# EAGLE board Netzteil_Darlington_v2 (EAGLE 8.6.3)
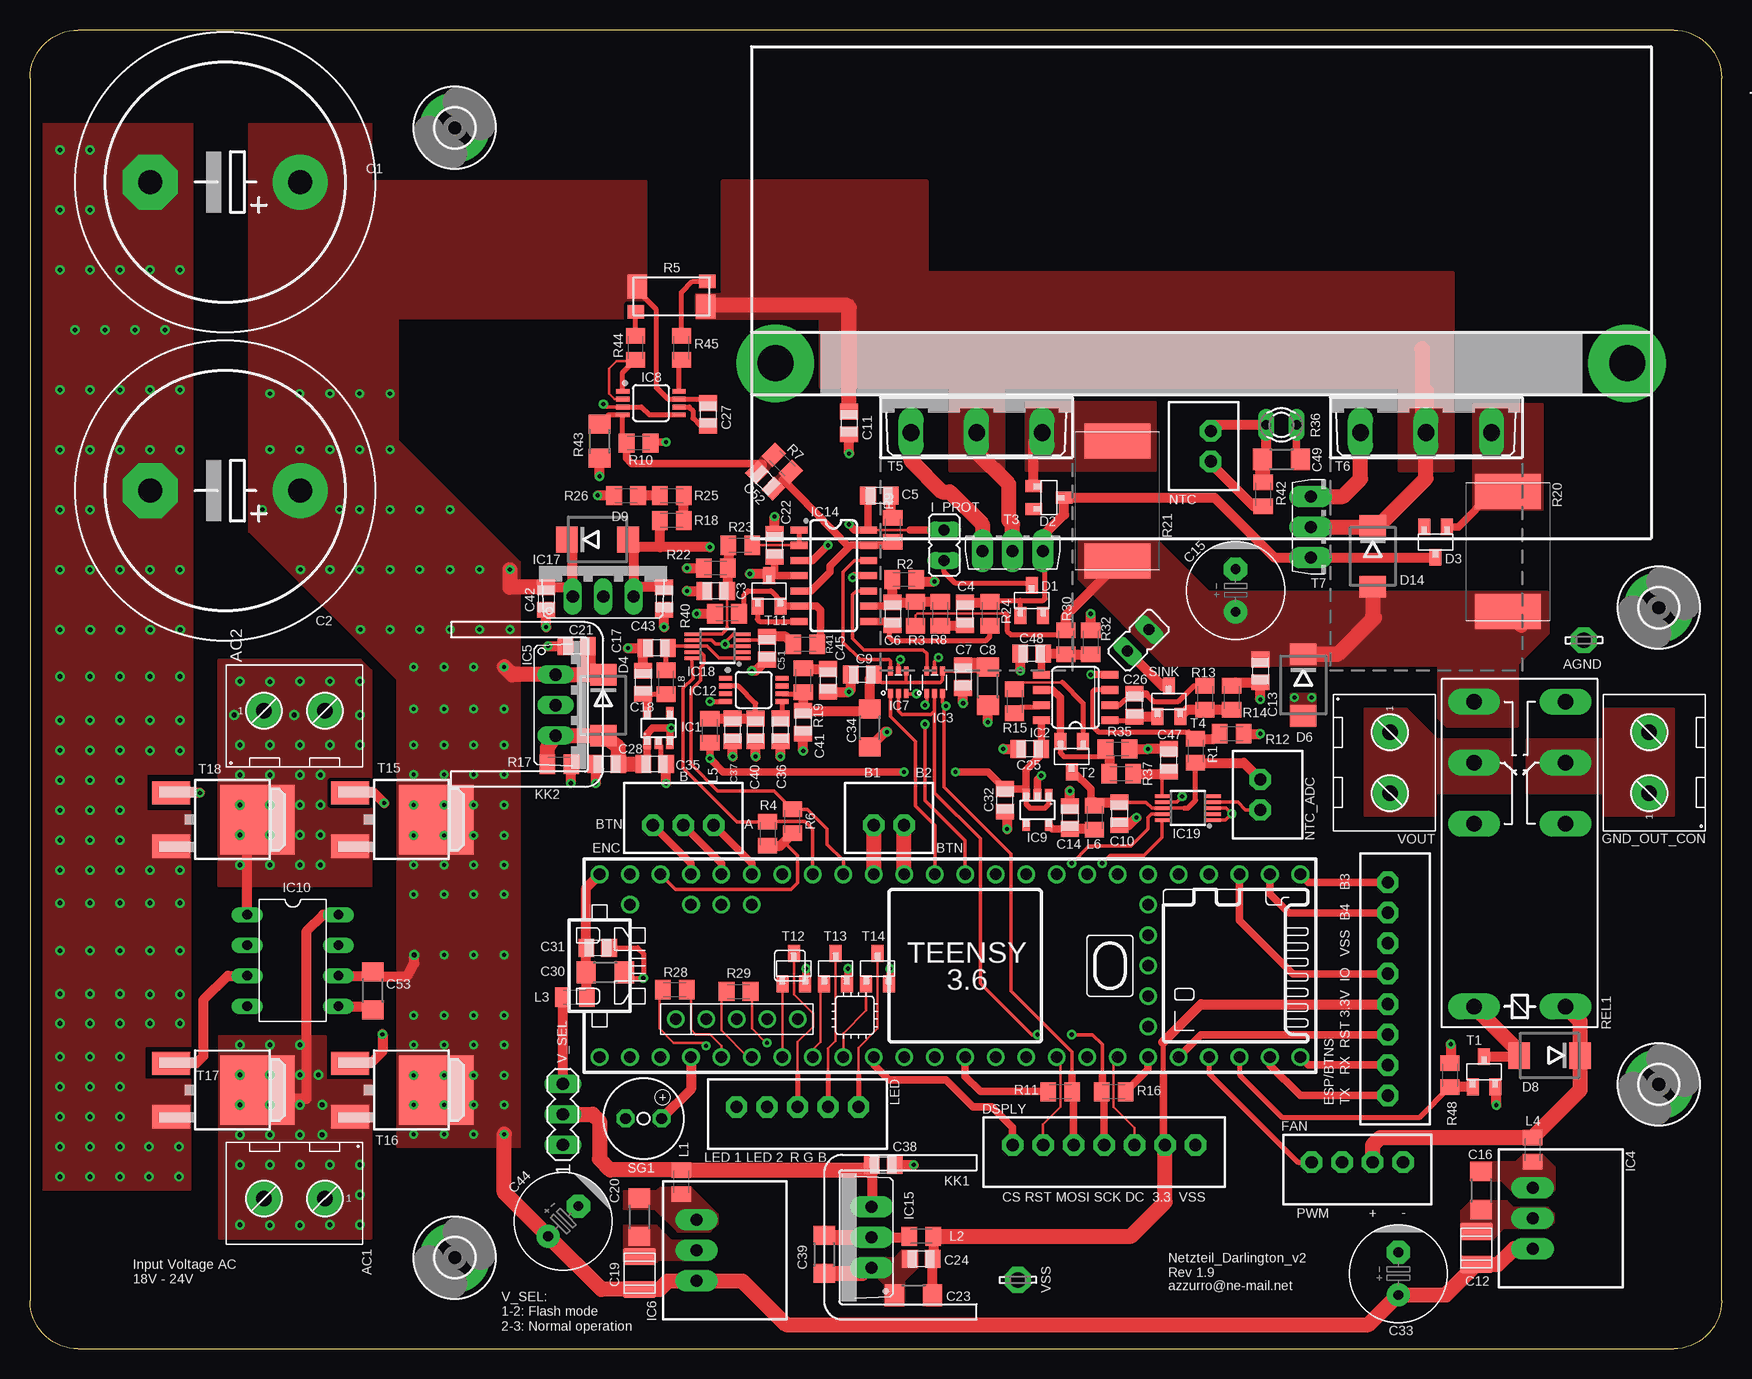
[diagram p0: board, top side]
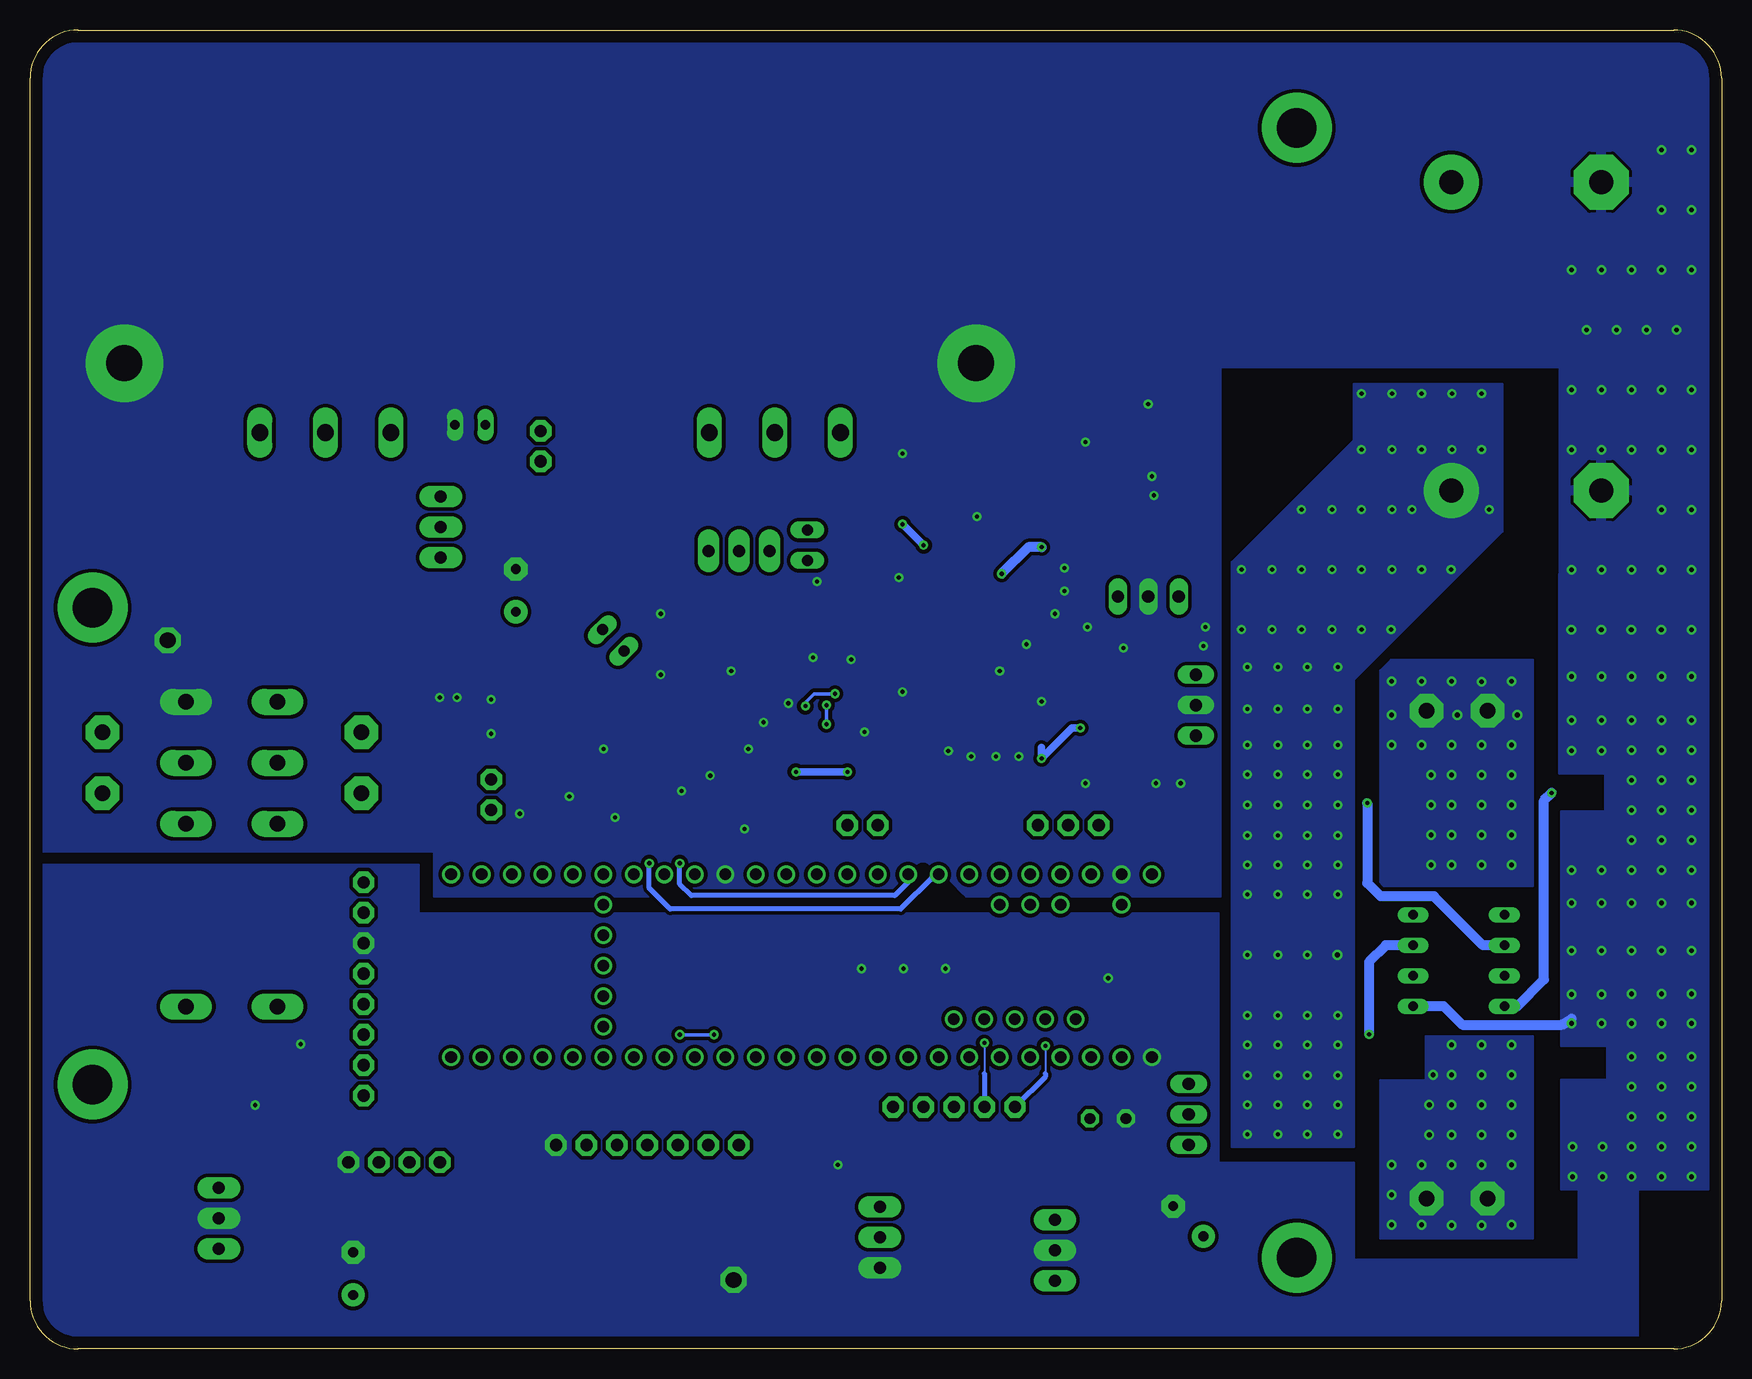
[diagram p1: board, bottom side, seen from below]

Size 141 x 109.94 mm. Coordinates in mm from the lower left corner, seen from the top.
Outline: 4,0 137,0 arc90 141,4 141,105.94 arc90 137,109.94 4,109.94 arc90 0,105.94 0,4 arc90 4,0
Copper layers (1*16): Top 0.035mm / dielectric 1.5mm / Bottom 0.035mm
Design rules "default *": minimum track width 6mil, minimum drill 0.2mm, track to track 6mil, track to pad 6mil, pad to pad 6mil, via to via 6mil, smd to smd 6mil, copper to edge 40mil, drill to drill 6mil, minimum pad ring 10mil, minimum via ring 8mil, stop-mask expansion 4mil, vias tented up to drill 15mil, thermal gap 10mil
bRestrict: area 66.4,39.9 to 66.8,40.1; area 63.4,37.5 to 65.1,38.7

## Footprints (pad centres in the part's own frame; a part is rotated, then mirrored left to right if it is on the bottom)
KL2-691311500002 = drill 1.3 pad 2.8 octagon: 1 -2.54,0; 2 2.54,0
LSP13 = drill 1.321 pad 2.159 octagon: MP 0,0
JST-PH-2.0-2P = drill 1.016 pad 1.778 octagon: 1 -1.27,0; 2 1.27,0
EB22,5D = drill 2.007 pad 4.597: + -6.25,0 | drill 2.007 pad 4.597 octagon: - 6.25,0
0805 = smd 1.3 x 1.5: 1 -0.953,0; 2 0.953,0
1206 = smd 1.803 x 1.6: 1 0,1.587; 2 0,-1.587
C1210 = smd 2.7 x 1.45: 1 0,1.4; 2 0,-1.35
C+/3.5/8 = drill 0.813 pad 1.93: + -1.778,0 | drill 0.813 pad 1.93 octagon: - 1.778,0
SOT23 = smd 1 x 1.4: 1 -0.953,-1.27; 2 0.953,-1.27; 3 0,1.27
DO214AA-CGRB307-G = smd 1.8 x 2.2: A 2.55,0; C -2.55,0
JST-PH-2.0-7P = drill 1.016 pad 1.778 octagon: 1 -7.62,0; 2 -5.08,0; 3 -2.54,0; 4 0,0; 5 2.54,0; 6 5.08,0; 7 7.62,0
JST-PH-2.0-3P = drill 1.016 pad 1.778 octagon: 1 -2.54,0; 2 0,0; 3 2.54,0
JST-PH-2.0-8P = drill 1.016 pad 1.778 octagon: 1 -8.89,0; 2 -6.35,0; 3 -3.81,0; 4 -1.27,0; 5 1.27,0; 6 3.81,0; 7 6.35,0; 8 8.89,0
JST-PH-2.0-4P = drill 1.016 pad 1.778 octagon: 1 -3.81,0; 2 -1.27,0; 3 1.27,0; 4 3.81,0
3,3-PAD = drill 3.3 pad 5.842: B3,3 0,0
OMNI-UNI-41-75 = drill 3 pad 6.452: 1 -35.5,2.6; 2 35.5,2.6
JP1 = drill 0.914 long: 1 0,-1.27; 2 0,1.27
SOT23-5 = smd 0.635 x 0.952: 1 -0.953,-1.27; 2 0,-1.27; 3 0.953,-1.27; 4 0.953,1.27; 5 -0.953,1.27
SOP8 = smd 0.635 x 1.422: 1 -1.905,-2.857; 2 -0.635,-2.857; 3 0.635,-2.857; 4 1.905,-2.857; 5 1.905,2.857; 6 0.635,2.857; 7 -0.635,2.857; 8 -1.905,2.857
SC-70-6 = smd 0.4 x 0.75: 1 -0.65,-0.925; 2 0,-0.925; 3 0.65,-0.925; 4 0.65,0.925; 5 0,0.925; 6 -0.65,0.925
78XX-DC-DC = drill 1 pad 1.778 long: 1 -2.54,0; 2 0,0; 3 2.54,0
TO220V = drill 1.016 long: 1 -2.54,-2.54; 2 0,-2.54; 3 2.54,-2.54
MSOP8-0.65-3X3MM = smd 1.1 x 0.4: 1 -2.35,0.975; 2 -2.35,0.325; 3 -2.35,-0.325; 4 -2.35,-0.975; 5 2.35,-0.975; 6 2.35,-0.325; 7 2.35,0.325; 8 2.35,0.975
DIL08 = drill 0.8 long: 1 -3.81,-3.81; 2 -1.27,-3.81; 3 1.27,-3.81; 4 3.81,-3.81; 5 3.81,3.81; 6 1.27,3.81; 7 -1.27,3.81; 8 -3.81,3.81
SO14 = smd 0.6 x 1.4: 1 -3.81,-2.9; 2 -2.54,-2.9; 3 -1.27,-2.9; 4 0,-2.9; 5 1.27,-2.9; 6 2.54,-2.9; 7 3.81,-2.9; 8 3.81,2.9; 9 2.54,2.9; 10 1.27,2.9; 11 0,2.9; 12 -1.27,2.9; 13 -2.54,2.9; 14 -3.81,2.9
TO220V' = drill 1 pad 1.778 long: 1 -2.54,0; 2 0,0; 3 2.54,0
MSOP10 = smd 0.3 x 1.2: 1 -1,-2.15; 2 -0.5,-2.15; 3 0,-2.15; 4 0.5,-2.15; 5 1,-2.15; 6 1,2.15; 7 0.5,2.15; 8 0,2.15; 9 -0.5,2.15; 10 -1,2.15
C0805K = smd 1.3 x 1.6: 1 -1,0; 2 1,0
JST-PH-2.0-5P = drill 1.016 pad 1.778 octagon: 1 -5.08,0; 2 -2.54,0; 3 0,0; 4 2.54,0; 5 5.08,0
CSM2512 = smd 1.39 x 1.14: E1 -2.985,-1.27; E2 2.985,1.27 | smd 1.65 x 2.01: I1 -2.855,0.835; I2 2.855,-0.835
SLN2 = smd 2.9 x 5.5: 1 -5,0; 2 5,0
P640 = drill 0.813 long: 1 -1.27,0; 2 1.27,0
R1206 = smd 1.6 x 1.803: 1 -1.422,0; 2 1.422,0
REL-G2R2 = drill 1.3 pad 2.184 long: + -12.7,3.81; - -12.7,-3.81; O1 2.54,3.81; O2 2.54,-3.81; P1 7.62,3.81; P2 7.62,-3.81; S1 12.7,3.81; S2 12.7,-3.81
254-EMB73-RO = drill 0.9 pad 1.5 octagon: + 1.5,0; - -1.5,0
SOT23-BEC = smd 1 x 1.4: B -0.953,-1.27; C 0,1.27; E 0.953,-1.27
TO126 = drill 1 pad 1.778 long: 1 -2.54,0; 2 0,0; 3 2.54,0
TOP3AV = drill 1.397 long: B -5.461,-3.175; C 0,-3.175; E 5.461,-3.175
DPACK = smd 1.93 x 3.175: 1 -2.223,0; 2 2.223,0 | smd 5.8 x 6.2: 3 0,7.18
TEENSY_3.5/3.6 = drill 0.965: 0/RX -25.4,-7.62; 1/TX -22.86,-7.62; 2 -20.32,-7.62; 3/CANTX -17.78,-7.62; 3V3 7.62,-7.62; 3V3_2 17.78,-2.54; 3V3_LO -22.86,7.62; 4/CANRX -15.24,-7.62; 5 -12.7,-7.62; 6 -10.16,-7.62; 7 -7.62,-7.62; 8 -5.08,-7.62; 9/CS -2.54,-7.62; 10/CS 0,-7.62; 11/MOSI 2.54,-7.62; 12/MISO 5.08,-7.62; 13/SCK 5.08,7.62; 14/A0 2.54,7.62; 15/A1 0,7.62; 16/A2 -2.54,7.62; 17/A3 -5.08,7.62; 18/A4/SDA -7.62,7.62; 19/A5/SCL -10.16,7.62; 20/A6 -12.7,7.62; 21/A7 -15.24,7.62; 21/DAC0 12.7,7.62; 22/A8 -17.78,7.62; 23/A9 -20.32,7.62; 24 10.16,-7.62; 25 12.7,-7.62; 26 15.24,-7.62; 27 17.78,-7.62; 28 20.32,-7.62; 29 22.86,-7.62; 30 25.4,-7.62; 31/A12 27.94,-7.62; 32/A13 30.48,-7.62; 33/A14 30.48,7.62; 34/A15 27.94,7.62; 35/A16 25.4,7.62; 36/A17 22.86,7.62; 37/A18 20.32,7.62; 38/A19 17.78,7.62; 39/A20 15.24,7.62; A10 -17.78,5.08; A11 -15.24,5.08; A22/DAC1 10.16,7.62; AGND -25.4,7.62; AREF -20.32,5.08; GND -27.94,-7.62; GND2 7.62,7.62; GND3 17.78,0; PROG 17.78,2.54; RESET 17.78,5.08; U5V -21.59,-4.445; UD+ -16.51,-4.445; UD- -19.05,-4.445; UGND1 -13.97,-4.445; UGND2 -11.43,-4.445; VBAT 17.78,-5.08; VIN -27.94,7.62; VUSB -25.4,5.08
MA03-1 = drill 1.016 long: 1 -2.54,0; 2 0,0; 3 2.54,0

## Placement (x,y rotation side)
AC1  AC1  [KL2-691311500002]  22.04,12.53 180 top
AC2  AC2  [KL2-691311500002]  22.04,53.19 0 top
AGND  LSP13  [LSP13]  129.52,59.07 0 top
BTN  [JST-PH-2.0-2P]  71.6,43.66 180 top
C1  10000µ/50V  [EB22,5D]  16.28,97.26 180 top
C2  10000µ/50V  [EB22,5D]  16.28,71.54 180 top
C3  100n/16V  [0805]  57.15,63.18 180 top
C4  10n/50V  [0805]  77.95,61.28 90 top
C5  1n/50V  [0805]  70.8,71.12 180 top
C6  22pF/35V C0G  [0805]  71.91,61.28 270 top
C7  100n/16V  [0805]  77.79,56.04 270 top
C8  10µ/16V  [1206]  79.85,55.25 0 top
C9  100n/16V  [0805]  69.37,56.2 180 top
C10  100n/16V  [0805]  90.81,44.61 270 top
C11  330n opt/50V  [0805]  68.27,77.18 270 top
C12  10µ/50V  [C1210]  120.57,8.39 0 top
C13  100n opt/50V  [0805]  102.55,56.52 270 top
C14  1µ/16V  [0805]  86.68,44.29 270 top
C15  100µ/50V  [C+/3.5/8]  100.5,63.22 90 top
C16  10µ/25V  [1206]  120.97,13.2 180 top
C17  100n/16V  [0805]  52.23,58.42 180 top
C18  1µ/16V  [0805]  51.12,55.56 270 top
C19  10µ/50V  [C1210]  50.8,6.29 0 top
C20  10µ/16V  [1206]  50.8,10.98 180 top
C21  330n/50V  [0805]  45.56,58.58 180 top
C22  100n/35V  [0805]  62.07,66.99 90 top
C23  10µ/16V  [1206]  73.65,4.47 270 top
C24  100n/16V  [0805]  74.29,7.49 180 top
C25  100n/35V  [0805]  83.34,50.01 180 top
C26  1n/50V  [0805]  92.08,53.66 90 top
C27  100n/50V  [0805]  56.52,77.89 270 top
C28  100n/35V  [0805]  48.1,48.74 180 top
C30  10µ/16V  [1206]  47.95,31.38 90 top
C31  100n/16V  [0805]  47.32,33.44 0 top
C32  1µ/35V  [0805]  81.28,45.72 90 top
C33  100µ/50V  [C+/3.5/8]  114.06,6.27 90 top
C34  10µ/16V  [1206]  70.01,51.75 0 top
C35  1µ/35V  [0805]  52.07,48.74 180 top
C36  1µ/16V  [0805]  62.55,51.59 270 top
C37  1µ/35V  [0805]  58.58,51.59 90 top
C38  100n/16V  [0805]  71.12,15.34 0 top
C39  10µ/16V  [1206]  66.2,7.87 180 top
C40  100n/35V  [0805]  60.48,51.59 90 top
C41  1µ/16V  [0805]  64.45,52.23 270 top
C42  330n/50V  [0805]  43.02,62.55 270 top
C43  100n/35V  [0805]  52.86,62.55 270 top
C44  100µ/50V  [C+/3.5/8]  44.45,10.64 45 top
C45  1µ/16V  [0805]  66.52,55.72 270 top
C47  10n/16V  [0805]  94.93,49.05 90 top
C48  100n/16V  [0805]  83.5,57.94 180 top
C49  10µ/16V  [1206]  104.31,74.16 270 top
C51  10n/16V  [0805]  61.44,58.42 270 top
C52  22p opt/35V C0G  [0805]  61.28,72.39 135 top
C53  1µ/50V  [1206]  28.58,29.84 0 top
D1  BAT54FILMY  [SOT23]  83.5,62.39 0 top
D2  BAT54FILMY  [SOT23]  84.93,70.96 270 top
D3  BAT54FILMY  [SOT23]  117.17,67.26 180 top
D4  CGRB307-G  [DO214AA-CGRB307-G]  47.78,53.66 270 top
D6  CGRB307-G  [DO214AA-CGRB307-G]  106.13,55.34 270 top
D8  CGRB307-G  [DO214AA-CGRB307-G]  126.66,24.46 180 top
D9  CGRB307-G  [DO214AA-CGRB307-G]  47.31,67.47 0 top
D14  CGRB307-G  [DO214AA-CGRB307-G]  111.93,66.06 270 top
DSPLY  [JST-PH-2.0-7P]  89.53,16.99 0 top
ENC  [JST-PH-2.0-3P]  54.45,43.66 180 top
ESP/BTNS  [JST-PH-2.0-8P]  113.19,30 90 top
FAN  [JST-PH-2.0-4P]  110.65,15.56 0 top
GND_OUT_CON  GND  [KL2-691311500002]  134.97,48.86 90 top
H1  MOUNT-PAD-ROUND3.3  [3,3-PAD]  35.41,101.78 0 top
H2  MOUNT-PAD-ROUND3.3  [3,3-PAD]  35.41,7.6 0 top
H3  MOUNT-PAD-ROUND3.3  [3,3-PAD]  135.78,22.04 0 top
H4  MOUNT-PAD-ROUND3.3  [3,3-PAD]  135.78,61.78 0 top
HS2  HSOMNI-UNI-41-75  [OMNI-UNI-41-75]  97.64,79.56 0 top
I_PROT  [JP1]  76.2,66.99 0 top
IC1  NCP718BSN330T1G  [SOT23-5]  52.39,51.75 0 top
IC2  OPA2197  [SOP8]  87.15,54.29 90 top
IC3  DAC8311  [SC-70-6]  75.41,55.56 0 top
IC4  VXO78012-1000  [78XX-DC-DC]  125.25,10.9 90 top
IC5  7815TV  [TO220V]  46.35,53.66 270 top
IC6  VXO7805-1000  [78XX-DC-DC]  55.56,8.2 90 top
IC7  DAC8311  [SC-70-6]  72.39,55.56 0 top
IC8  LTC6102HMS8#PBF  [MSOP8-0.65-3X3MM]  51.76,78.84 0 top
IC9  NCP718BSN330T1G  [SOT23-5]  83.98,44.93 180 top
IC10  LT4320DIL08  [DIL08]  21.91,32.38 270 top
IC12  REF5040  [MSOP8-0.65-3X3MM]  60.33,54.93 0 top
IC14  QUAD-OPVOPA4197  [SO14]  66.99,64.45 270 top
IC15  LD33V  [TO220V']  70.17,9.3 90 top
IC17  7818TV  [TO220V]  47.78,65.25 0 top
IC18  ADS1115  [MSOP10]  57.31,58.58 90 top
IC19  ADS1115  [MSOP10]  96.52,45.09 90 top
KK1  D01S  [D01S]  67.47,9.31 270 top
KK2  D01S  [D01S]  46.51,53.71 90 top
L1  MPZ2012S601AT000  [C0805K]  54.29,13.91 90 top
L2  MPZ2012S601AT000  [C0805K]  74.3,9.39 0 top
L3  MPZ2012S601AT000  [C0805K]  45.41,29.31 180 top
L4  MPZ2012S601AT000  [C0805K]  125.25,16.61 90 top
L5  MPZ2012S601AT000  [C0805K]  56.67,51.54 270 top
L6  MPZ2012S601AT000  [C0805K]  88.74,44.29 270 top
L8  MPZ2012S601AT000  [C0805K]  53.02,55.56 270 top
LED  [JST-PH-2.0-5P]  63.98,20.16 0 top
NTC  [JST-PH-2.0-2P]  98.42,75.25 270 top
NTC_ADC  [JST-PH-2.0-2P]  102.55,46.2 90 top
R1  12k 0.5% 50 ppm 1/10W  [C0805K]  97.16,49.85 90 top
R2  10k 0.1% 10ppm  [C0805K]  72.87,64.14 180 top
R3  30k 0.1% 10ppm  [C0805K]  73.82,61.28 90 top
R4  10k 5% 1/10W  [C0805K]  61.49,42.94 270 top
R5  10m 0.1% 15ppm 0.5W  [CSM2512]  53.48,87.72 180 top
R6  10k 5% 1/10W  [C0805K]  63.55,43.97 90 top
R7  10k 5% 1/10W  [C0805K]  62.71,73.82 135 top
R8  47k 1% 1/10W  [C0805K]  75.88,61.28 90 top
R9  4.7k 1% 1/10W  [C0805K]  71.91,68.26 270 top
R10  4.7k opt 1% 1/10W  [C0805K]  50.73,75.51 0 top
R11  22R 5% 1/10W  [C0805K]  85.88,21.43 180 top
R12  221R 0.5% 50ppm 1/10W  [C0805K]  100.17,51.28 0 top
R13  1k 0.5% 50 ppm 1/10W  [C0805K]  97.95,54.29 270 top
R14  10R 0.5% 50 ppm 1/4W  [C0805K]  100.17,54.29 90 top
R15  1k5 5% 1/8W  [C0805K]  82.07,53.98 270 top
R16  22R 5% 1/10W  [C0805K]  90.33,21.43 0 top
R17  2k2 5% 1/8W  [C0805K]  44.13,48.74 0 top
R18  1k 1% 1/8W  [C0805K]  53.5,69.06 0 top
R19  1.27R 1% 1/10W  [C0805K]  64.45,55.72 90 top
R20  0R1 0.5% 7W  [SLN2]  123.2,66.46 270 top
R21  0R1 0.5% 7W  [SLN2]  90.66,70.67 90 top
R22  10.1k 0.1% 10ppm 1/10W  [C0805K]  57.15,65.09 0 top
R23  90.9k 0.1% 10ppm 1/10W  [C0805K]  59.21,66.99 0 top
R24  1k 1% 1/10W  [C0805K]  80.01,61.28 90 top
R25  1k 1% 1/8W  [C0805K]  53.5,71.12 180 top
R26  1k 1% 1/8W  [C0805K]  49.69,71.12 180 top
R28  220R 5% 1/10W  [C0805K]  53.75,29.95 180 top
R29  220R 5% 1/10W  [C0805K]  59.06,29.79 0 top
R30  90.9k 0.1% 10ppm 1/10W  [C0805K]  86.36,58.9 90 top
R32  10.1k 0.1% 10ppm 1/10W  [C0805K]  88.42,58.9 270 top
R35  4.7k 5% 1/10W  [C0805K]  90.65,50.01 0 top
R36  100k  [P640]  104.31,77.02 180 top
R37  2.2k 5% 1/10W  [C0805K]  90.96,47.94 0 top
R40  4.7k 5% 1/10W  [C0805K]  58.1,61.28 180 top
R41  2.2k 5% 1/10W  [C0805K]  64.61,58.74 180 top
R42  64.9k 1% 1/10W  [C0805K]  102.79,71.23 90 top
R43  5k 0.1% 25ppm  [R1206]  47.48,75.67 90 top
R44  100R 0.1% 5ppm 1/10W  [C0805K]  50.48,83.46 270 top
R45  100R 0.1% 5ppm 1/10W  [C0805K]  54.3,83.45 90 top
R48  10k 5% 1/10W  [C0805K]  118.37,22.82 270 top
REL1  G2R-2-DC12  [REL-G2R2]  124.18,41.23 90 top
SG1  BUZZER  [254-EMB73-RO]  51.16,19.2 0 top
SINK  [JP1]  92.39,59.05 135 top
T1  PMV130ENEAR  [SOT23]  121.21,23.1 0 top
T2  BC847ALT1G  [SOT23-BEC]  86.84,49.37 180 top
T3  BD139  [TO126]  81.92,66.52 0 top
T4  PMV130ENEAR  [SOT23]  94.93,53.98 0 top
T5  TIP3055  [TOP3AV]  78.91,79.56 0 top
T6  TIP3055  [TOP3AV]  116.37,79.56 0 top
T7  BD139  [TO126]  106.76,68.52 270 top
T11  BC847ALT1G  [SOT23-BEC]  61.59,63.18 0 top
T12  PMV130ENEAR  [SOT23]  63.67,31.7 0 top
T13  PMV130ENEAR  [SOT23]  67.16,31.7 0 top
T14  PMV130ENEAR  [SOT23]  70.65,31.7 0 top
T15  IRFR7546TRPBF  [DPACK]  26.7,44.13 270 top
T16  IRFR7546TRPBF  [DPACK]  26.7,21.58 270 top
T17  IRFR7546TRPBF  [DPACK]  11.78,21.58 270 top
T18  IRFR7546TRPBF  [DPACK]  11.78,44.13 270 top
U$33  TEENSY_3.5/3.6  [TEENSY_3.5/3.6]  75.42,31.93 0 top
V_SEL  [MA03-1]  44.42,19.55 90 top
VOUT  [KL2-691311500002]  113.36,48.86 270 top
VSS  LSP13  [LSP13]  82.34,5.74 0 top

## Library data of the parts
AC1 = neumluc; OC_MOUSER: 710-691311500002; OC_MOUSER_ADD: 693-8601.2001.08; OC_MOUSER_ADD2: 693-3101.0010
AC2 = neumluc; OC_MOUSER: 710-691311500002; OC_MOUSER_ADD: 693-8601.2001.08
AGND VSS = solpad
BTN DSPLY ENC ESP/BTNS FAN LED NTC NTC_ADC = neumluc
C1 C2 = neumluc; OC_MOUSER: 647-UVZ1H103MRD
C3 C7 C9 C10 C13 C17 C22 C24 C25 C27 C28 C31 C38 C40 C43 C48 = goujine; OC_MOUSER: 810-C2012X7R2A104K
C4 C47 C51 = goujine; OC_MOUSER: 80-C0805C103K1R
C5 C26 = goujine; OC_MOUSER: 603-CC805KRX7R0BB102
C6 C52 = goujine; OC_MOUSER: 603-CC805JRNPO9BN220
C8 C16 C20 C23 C30 C34 C39 C49 = goujine; OC_MOUSER: 963-TMK316AB7106KL-T
C11 C21 C42 = goujine; OC_MOUSER: 80-C0805C334K5RECTU
C12 C19 = we-rcl; OC_MOUSER: 81-GRM32ER71H106MA2L
C14 C18 C32 C35-C37 C41 C45 = goujine; OC_MOUSER: 963-UMK212B7105KG-T
C15 C33 C44 = goujine; OC_MOUSER: 667-EEU-FR1H101
C53 = goujine; OC_MOUSER: 603-CC126KKX7R9BB105
D1-D3 = neumluc; OC_MOUSER: 511-BAT54FILMY
D4 D6 D8 D9 D14 = neumluc; OC_MOUSER: 750-CGRB307-G
GND_OUT_CON = neumluc; OC_MOUSER: 710-691311500002
H1-H4 = holes
HS2 = neumluc; OC_MOUSER: 567-OMNI-UNI-41-75; OC_MOUSER_ADD: 567-OMNI-UC; OC_MOUSER_ADD2: 567-CD-02-05-247
I_PROT SINK = jumper
IC1 IC9 = neumluc; OC_MOUSER: 863-NCP718BSN330T1G
IC2 = goujine; OC_MOUSER: 595-OPA2197IDR
IC3 IC7 = neumluc; OC_MOUSER: 595-DAC8311IDCKR
IC4 = neumluc; OC_MOUSER: 490-VXO7812-1000
IC5 = linear; OC_MOUSER: 511-L7815CV-DG
IC6 = neumluc; OC_MOUSER: 490-VXO7805-1000
IC8 = neumluc; OC_MOUSER: 584-LTC6102HMS8#PBF
IC10 = neumluc; OC_MOUSER: 584-LT4320HN8-1#PBF
IC12 = neumluc; OC_MOUSER: 595-REF5040AIDGKR
IC14 = neumluc; OC_MOUSER: 595-OPA4197IDR
IC15 = neumluc; OC_MOUSER: 511-LD1117V33
IC17 = linear; OC_MOUSER: 511-L7818CV-DG
IC18 IC19 = neumluc; OC_MOUSER: 595-ADS1115IDGSR; PROD_ID: IC-12270
KK1 KK2 = heatsink; OC_MOUSER: 532-576802B00
L1-L6 L8 = neumluc; OC_MOUSER: 810-MPZ2012S601AT000
R1 = neumluc; OC_MOUSER: 754-RR1220P-123D
R2 = neumluc; OC_MOUSER: 667-ERA-6ARW103V
R3 = neumluc; OC_MOUSER: 667-ERA-6ARW303V
R4 R6 R7 R48 = neumluc; OC_MOUSER: 652-CR0805-JW-103ELF
R5 = neumluc; OC_MOUSER: 71-CSM25120R0100BST
R8 = neumluc; OC_MOUSER: 652-CR0805FX-4702ELF
R9 R10 R35 R40 = neumluc; OC_MOUSER: 652-CR0805FX-4701ELF
R11 R16 = neumluc; OC_MOUSER: 652-CR0805JW-220ELF
R12 = neumluc; OC_MOUSER: 754-RR1220P-2210D-M
R13 = neumluc; OC_MOUSER: 754-RR1220P-102D
R14 = neumluc; OC_MOUSER: 660-SG73G2ATTD10R0D
R15 R22 R32 = neumluc; OC_MOUSER: 660-RN732ATTD1012B25
R17 = neumluc; OC_MOUSER: 652-CR0805JW-222ELF
R18 R24-R26 = neumluc; OC_MOUSER: 652-CR0805FX-1001ELF
R19 = neumluc; OC_MOUSER: 71-CRCW08051R27FKEA
R20 R21 = neumluc; OC_MOUSER: 66-SLN5TTED82L0D
R23 R30 = neumluc; OC_MOUSER: 279-RN73CA-90.9K
R28 R29 = neumluc; OC_MOUSER: 652-CR0805FX-2200ELF
R36 = ptc-ntc; OC_FARNELL: unknown; OC_MOUSER: 594-NTCLE213E3104HXB; OC_NEWARK: unknown
R37 R41 = neumluc; OC_MOUSER: 652-CR0805FX-2201ELF
R42 = neumluc; OC_MOUSER: 652-CR0805FX-6492ELF
R43 = resistor; OC_MOUSER: 71-TNPW12065K00BEEN
R44 R45 = neumluc; OC_MOUSER: 756-PCF080513100RBT1
REL1 = goujine; OC_MOUSER: 653-G2R-2-DC12
SG1 = neumluc; OC_FARNELL: unknown; OC_MOUSER: 254-EMB73-RO; OC_NEWARK: unknown
T1 T4 = neumluc; OC_MOUSER: 771-PMV130ENEAR
T2 T11 = neumluc; OC_MOUSER: 863-BC847ALT1G
T3 T7 = neumluc; OC_MOUSER: 511-BD139-10
T5 T6 = neumluc; OC_MOUSER: 863-TIP3055G
T12-T14 = goujine; OC_MOUSER: 771-PMV130ENEAR
T15-T18 = neumluc; OC_MOUSER: 942-IRFR7546TRPBF
U$33 = Teensy356; OC_MOUSER: 474-DEV-14055
V_SEL = con-lstb; OC_FARNELL: unknown; OC_NEWARK: unknown
VOUT = neumluc; OC_MOUSER: 710-691311500002; OC_MOUSER_ADD: 565-72912-2; OC_MOUSER_ADD2: 565-6883

## Nets
3.3V_A2_FILTERED: C10.1 IC19.8 L6.1 NTC_ADC.2 R1.1 T2.C
3.3V_TH: NTC.2 R42.1
+3.3V: C23.1 C24.1 DSPLY.6 ESP/BTNS.4 L2.2
+3.3V_A: C18.2 IC1.5 L8.2
+3.3V_A2: C14.2 IC9.5 L6.2
+3.3V_LP: R4.2 R6.1 U$33.3V3_LO
+5V_INT_D: C38.1 IC15.3 L1.2 V_SEL.2
+5V_USB: C30.1 C31.1 L3.1 U$33.VIN
+12V: D8.C FAN.3 L4.2 REL1.-
+15V: C25.1 C28.1 C32.2 C35.2 D4.A IC1.1 IC1.3 IC2.8 IC5.3 IC9.1 IC9.3 L5.2 R17.1
+18V: C22.1 C43.1 D9.A IC14.4 IC17.3 R18.1 T11.C
+27V: C1.+ C2.+ C12.2 C19.2 C21.1 C27.1 C33.+ C42.1 C44.+ C53.1 D4.C D9.C IC4.1 IC5.1 IC6.1 IC8.7 IC10.6 IC17.1 R5.I2 T15.3 T16.3
+V_ADJ: C13.1 C15.+ D6.C D14.A R3.1 R20.2 R21.1 R30.2 REL1.S1 SINK.1
ADC_CH0: C51.1 IC18.4 R41.2
ADC_CH2: C47.1 IC19.6 R37.2
ADC_CH3: C3.1 IC18.6 R22.2 R23.1
ADC_VOUT: C48.1 IC2.5 R30.1 R32.2
AGND: AGND.MP C3.2 C7.2 C8.2 C9.2 C10.2 C11.2 C13.2 C14.1 C15.- C17.2 C18.1 C21.2 C22.2 C25.2 C28.2 C32.1 C34.2 C35.1 C36.2 C37.1 C40.1 C41.2 C42.2 C43.2 C45.2 C47.2 C48.2 C49.1 C51.2 D6.A HS2.1 HS2.2 IC1.2 IC2.4 IC3.5 IC5.2 IC7.5 IC8.3 IC8.5 IC9.2 IC12.4 IC14.11 IC17.2 IC18.3 IC18.5 IC18.7 IC19.1 IC19.3 IC19.7 R2.1 R10.2 R12.2 R14.2 R17.2 R22.1 R26.2 R32.1 R35.2 R36.1 R40.2 R43.1 REL1.S2 U$33.AGND U$33.GND2
BTN1: BTN.2 U$33.17/A3
BTN2: BTN.1 U$33.16/A2
BTN3: ESP/BTNS.8 U$33.33/A14
BTN4: ESP/BTNS.7 U$33.34/A15
BUZZER: SG1.+ U$33.2
CRNT_READ: C52.1 IC14.5 IC14.13 R7.1 R9.2
CRNT_READ_RAW: C52.2 IC8.4 R7.2 R10.1 R43.2
DSPLY_CS: DSPLY.1 U$33.8
DSPLY_DC: DSPLY.5 U$33.26
DSPLY_LED_B: T14.1 U$33.7
DSPLY_LED_G: T13.1 U$33.6
DSPLY_LED_R: T12.1 U$33.5
DSPLY_RST: DSPLY.2 U$33.24
ENC_A: ENC.1 U$33.21/A7
ENC_B: ENC.2 U$33.22/A8
ENC_BTN: ENC.3 U$33.23/A9
ESP-IO: ESP/BTNS.5 U$33.35/A16
ESP-RST: ESP/BTNS.3 U$33.28
ESP-RX: ESP/BTNS.2 U$33.32/A13
ESP-TX: ESP/BTNS.1 U$33.31/A12
FAN-OUT: FAN.1 U$33.29
GND_OUT_CON: GND_OUT_CON.1 GND_OUT_CON.2 REL1.P2
IDAC_CS: IC7.1 U$33.15/A1
ISET: IC7.6 IC14.12
LED1: R28.1 U$33.3/CANTX
LED2: R29.1 U$33.4/CANRX
MOSI: DSPLY.3 IC3.3 IC7.3 R11.1
N$1: C20.2 IC6.3 L1.1
N$2: AC2.1 AC2.2 IC10.1 T15.2 T18.3
N$3: C11.1 D14.C R5.I1 T3.2 T5.C T6.C T7.2
N$4: D3.1 R20.1 T6.E
N$5: T6.B T7.1
N$6: IC14.7 T11.B
N$7: LED.3 T12.3
N$8: D2.1 R21.2 T5.E
N$9: R16.2 U$33.27
N$10: D1.3 I_PROT.1
N$11: IC2.3 R1.2 R12.1
N$12: IC2.7 R15.2
N$13: C16.2 IC4.3 L4.1
N$14: C36.1 IC12.5
N$15: T3.1 T5.B
N$16: R13.2 R14.1 T4.2
N$17: R11.2 U$33.11/MOSI
N$18: C26.2 IC2.2 R13.1
N$19: R15.1 T2.B
N$20: LED.1 R28.2
N$21: C6.2 IC14.8 R24.1
N$22: C4.2 D1.1 D2.3 D3.3 R24.2 T3.3 T7.3
N$23: LED.2 R29.2
N$24: C17.1 IC18.1 IC18.8 L8.1
N$25: C37.2 C40.2 IC12.2 L5.1
N$26: R18.2 R25.1
N$27: C4.1 R8.1
N$28: C5.1 R9.1
N$30: R25.2 R26.1
N$31: C6.1 IC14.9 R2.2 R3.2 R8.2
N$32: C45.1 R19.2
N$33: C26.1 IC2.1 T4.1
N$34: SINK.2 T4.3
N$35: C39.2 IC15.2 L2.1
N$36: L3.2 V_SEL.3
N$38: D8.A REL1.+ T1.3
N$41: IC2.6 R35.1 R37.1 T2.E
N$45: IC14.6 R40.1 R41.1 T11.E
N$46: LED.4 T13.3
N$47: IC8.8 R45.1
N$48: LED.5 T14.3
N$49: IC8.1 IC8.2 R44.2
N$50: C27.2 IC8.6
N$51: R5.E2 R44.1
N$52: R5.E1 R45.2
N$53: IC10.2 T15.1
N$54: IC10.3 T17.1
N$55: IC10.7 T16.1
N$56: IC10.4 T18.1
N$57: AC1.1 AC1.2 IC10.8 T16.2 T17.3
OVRCRNT_DET: C5.2 I_PROT.2 IC14.3 IC14.14
OVRCRNT_DET_BUF: IC14.1 IC14.2 R23.2
P_VSS: C1.- C2.- C53.2 IC10.5 T17.2 T18.2
REL-OUT: R48.2 T1.1 U$33.30
SCK: DSPLY.4 IC3.2 IC7.2 R16.1
SCL: IC18.10 IC19.10 R4.1 U$33.19/A5/SCL
SDA: IC18.9 IC19.9 R6.2 U$33.18/A4/SDA
TH0: C49.2 NTC.1 R36.2 R42.2
TH0_ADC: IC19.4 NTC_ADC.1
V_OUT_CON: REL1.P1 VOUT.1 VOUT.2
VDAC_CS: IC3.1 U$33.14/A0
VREF4096: C7.1 C8.1 C9.1 C34.1 C41.1 IC3.4 IC7.4 IC12.6 R19.1
VSET: IC3.6 IC14.10
VSS: C12.1 C16.1 C19.1 C20.1 C23.2 C24.2 C30.2 C31.2 C33.- C38.2 C39.1 C44.- DSPLY.7 ESP/BTNS.6 FAN.4 IC4.2 IC6.2 IC15.1 R48.1 SG1.- T1.2 T12.2 T13.2 T14.2 U$33.GND VSS.MP

## Tracks (layer width: path | path; a pad name or v marks a point on that pad's centre or on a via)
3.3V_A2_FILTERED
  Top 0.305: C10.1 93.03,45.56 93.5,45.09 IC19.8 96.2,45.09
  Top 0.406: 96.2,45.09 96.52,45.09 97.16,45.72 R1.1
  Top 0.61: T2.C 87,48.1 88.42,46.67 88.42,45.88 88.74,45.56
  Top 0.813: C10.1 88.79,45.56 L6.1 88.74,45.56 | R1.1 101.17,48.85 NTC_ADC.2
3.3V_TH
  Top 0.813: NTC.2 98.42,73.82 102.01,70.23 R42.1
+3.3V
  Top 0.406: 94.47,22.88 94.47,25.58
  Top 0.61: 94.47,22.88 94.47,17.14 DSPLY.6
  Top 0.813: L2.2 75.3,7.55 C24.1 C23.1 | 94.47,25.58 97.62,28.73 ESP/BTNS.4
  Top 1.27: L2.2 91.78,9.39 94.61,12.22 DSPLY.6
+3.3V_A
  Top 0.406: C18.2 51.44,54.61 52.98,54.61 L8.2
  Top 0.61: IC1.5 51.44,54.61 | 51.44,54.61
+3.3V_A2
  Top 0.61: IC9.5 85.25,43.34 C14.2
  Top 0.813: L6.2 88.69,43.34 C14.2
+3.3V_LP
  Top 0.305: U$33.3V3_LO 53.83,38.28 63.42,38.28 63.98,38.84 63.98,41.12 62.84,42.26
  Top 0.813: R4.2 62.52,41.94 62.84,42.26 R6.1
+5V_INT_D
  Top 0.813: C38.1 70.17,14.92 | 70.17,14.92 IC15.3 | 70.16,14.91 70.17,14.92
  Top 1.27: 70.16,14.91 L1.2 48.37,14.91 47.47,15.82 47.47,19 46.91,19.55 V_SEL.2
+5V_USB
  Top 0.813: L3.1 46.41,31.33 C30.1 C31.1 46.36,38.44 U$33.VIN
+12V
  Top 1.27: FAN.3 111.92,16.99 112.55,17.62 L4.2 129.21,21.57 D8.C 129.21,27.31 REL1.-
+15V  (via drill 0.35)
  Top 0.406: IC9.3 83.03,45.4 83.34,45.09 84.61,45.09 84.93,45.4 IC9.1
  Top 0.61: L5.2 v56.67,49.21 57.78,48.1 v72.87,48.1 | 50.8,49.05 C35.2 51.44,49.05 IC1.1 51.44,51.28 51.91,51.75 v53.45,51.75 53.34,51.64 IC1.3 | IC9.3 83.03,46.67 | 83.03,46.67 83.03,48.26 84.3,49.53 C25.1 IC2.8 | v77.15,48.1 79.85,48.1 C32.2 83.03,46.67
  Top 1.27: R17.1 43.13,50.12 IC5.3 44.14,51.11 D4.A 49.05,50.16 C28.1 C35.2 | C35.2
  Bottom 0.61: 56.67,50.12 v56.67,49.21 54.13,51.75 v53.45,51.75 | v72.87,48.1 v77.15,48.1
+18V  (via drill 0.35)
  Top 0.61: C22.1 62.07,64.61 62.39,64.45 IC14.4 64.19,64.45 T11.C
  Top 0.813: v60.01,64.61 61.75,64.61 T11.C | D9.A 50.32,67 | 50.32,67 50.32,63.5 | 50.32,63.5 IC17.3 | C43.1 50.32,63.5 | v56.67,66.83 52.55,66.83 | 52.55,66.83 50.49,66.83 50.32,67 | R18.1 52.5,66.88 52.55,66.83
  Bottom 0.813: v56.67,66.83 57.78,66.83 v60.01,64.61
+27V  (via drill 0.35, 0.4)
  Top 0.406: IC8.7 53.2,79.17 53.19,79.16 52.23,80.12 52.23,86.62 50.62,88.23 R5.I2 | IC8.7 | IC8.7 56.2,79.17 C27.1
  Top 0.813: IC10.6 28.89,31.11 C53.1 28.94,31.06 31.43,31.06 32.02,32.13 v32.02,32.84 | 44.77,67 D9.C | 44.62,67.61 D9.C | IC17.1 45.24,63.5 | 45.24,63.5 45.24,66.98 D9.C | C42.1 45.24,63.5
  Top 1.27: IC4.1 123.69,8.36 122.37,7.04 C12.2 118.02,4.49 C33.+ 111.58,2.01 63.02,2.01 59.37,5.66 IC6.1 53.18,5.66 52.47,4.95 C19.2 47.63,4.95 C44.+ 39.53,13.04 v39.53,17.88 | 46.51,56.2 IC5.1 40.18,56.2 v39.53,56.85 | 46.51,56.2 48.09,56.2 D4.C | C21.1 46.51,56.2 | C42.1 40.01,63.5 v40.01,64.95
  other vias: 20,74.95 19.37,69.95 25.8,69.95 27.46,74.95 20,79.64 22.46,79.64 25,79.64 27.46,79.64 30,79.64 22.46,74.95 25,74.95 30,74.95 27.46,69.95 30,69.95 32.46,69.95 35,69.95 22.54,64.95 25,64.95 27.46,64.95 30,64.95 32.46,64.95 35,64.95 37.47,64.95 27.54,59.95 30,59.95 32.46,59.95 35,59.95 37.47,59.95 40.01,59.95 31.99,50.35 34.53,50.35 36.99,50.35 39.53,50.35 31.99,47.89 34.53,47.89 36.99,47.89 39.53,47.89 31.99,45.35 34.53,45.35 36.99,45.35 39.53,45.35 31.99,42.81 34.53,42.81 36.99,42.81 39.53,42.81 31.99,40.35 34.53,40.35 36.99,40.35 39.53,40.35 31.99,37.89 34.53,37.89 36.99,37.89 39.53,37.89 34.53,32.84 36.99,32.84 39.53,32.84 31.99,27.81 34.53,27.81 36.99,27.81 39.53,27.81 31.99,25.34 34.53,25.34 36.99,25.34 39.53,25.34 31.99,22.8 34.53,22.8 36.99,22.8 39.53,22.8 31.99,20.34 34.53,20.34 36.99,20.34 39.53,20.34 36.99,17.88 34.53,17.88 31.99,17.88 31.99,56.85 34.53,56.85 36.99,56.85 31.99,53.35 34.53,53.35 36.99,53.35 39.53,53.35
  pour Top (isolate 0.305, no thermals): 30.65,16.85 40.81,16.85 40.81,65.59 30.65,75.75 30.65,85.91 51.36,85.91 51.36,97.34 28.43,97.34 28.43,102.1 18.27,102.1 18.27,68.13 30.65,55.75
  pour Bottom (isolate 0.305, no thermals): 30.65,16.85 40.81,16.85 40.81,65.59 30.65,75.75 30.65,80.43 18.27,80.43 18.27,68.13 30.65,55.75
+V_ADJ
  Top 0.203: R3.1 73.82,61.12 73.98,61.28 81.28,61.28
  Top 0.406: 81.28,61.28 81.44,61.12 81.44,59.85 81.76,59.53 86.31,59.53 R30.2
  Top 0.813: R30.2 86.36,61.12 90.66,65.41 R21.1
  Top 1.27: 124.35,60.31 R20.2 | D14.A 111.93,61.11 112.08,60.96 109.01,57.89 D6.C
  pour Top (isolate 0.305, no thermals): 93.83,67.49 87.48,67.49 87.48,64.16 94.62,56.99 117.45,56.99 117.45,52.57 118.11,51.94 123.98,51.94 123.98,57.09 126.52,59.63 126.52,63.05 98.28,63.05
ADC_CH0
  Top 0.305: IC18.4 61.14,59.08 C51.1
  Top 0.813: R41.2 62.98,59.37 C51.1
ADC_CH2
  Top 0.305: IC19.6 94.37,47.87 93.34,47.94
  Top 0.813: R37.2 93.34,47.94 94.77,47.94 C47.1
ADC_CH3
  Top 0.203: 58.1,60.17 C3.1
  Top 0.305: IC18.6 57.67,59.58 58.1,60.01 58.1,60.17
  Top 0.813: R23.1 58.21,65.15 R22.2 58.15,63.23 C3.1
ADC_VOUT
  Top 0.61: IC2.5 84.3,57.78 C48.1
  Top 0.813: C48.1 86.31,57.94 R30.1 R32.2 | R32.2
AGND  (via drill 0.35)
  Top 0.305: IC8.3 48.04,78.52 v47.79,78.77 | IC18.5 58.63,59.58 57.94,58.9 v57.94,58.74 | IC18.3 58.1,58.58 v57.94,58.74 | IC18.7 56.81,59.08 57.15,58.74 v57.94,58.74 | IC19.7 95.59,45.59 v96.04,46.04 | IC19.3 99.69,45.09 v100.17,44.61 99.65,44.09 IC19.1 | IC7.5 72.39,57.31 v72.55,57.47 | IC3.5 75.41,57.31 v75.72,57.63
  Top 0.406: IC8.3 50.98,78.52 51.62,77.87 IC8.5 | IC1.2 52.55,50.32 52.55,49.21 C35.1 | v56.67,53.98 56.7,53.95 IC12.4
  Top 0.61: C49.1 105.58,74.48 R36.1 | R10.2 51.81,75.59 v53.03,75.59 | IC9.2 83.98,47.47 v84.3,47.78 | v88.42,56.2 IC2.4 | v68.58,64.29 68.74,64.45 IC14.11
  Top 0.813: v68.27,74.64 C11.2 | v54.77,65.09 R22.1 | v54.77,63.18 C3.2 | v55.56,61.28 R40.2 | C45.2 | C45.2 v68.26,54.77 68.42,54.93 C9.2 | v58.58,49.37 C37.1 | C37.1 | v60.48,49.37 C40.1 | C40.1 | v62.55,49.37 C36.2 | v64.45,49.85 C41.2 | C51.2 60.48,56.52 v60.17,56.52 | R35.2 v93.19,50.01 C47.2 | C10.2 91.6,43.66 v92.23,44.29 | R12.2 v102.55,51.28 | C14.1 v86.68,46.51 | C32.1 81.44,44.61 v81.44,43.34 | v45.09,47.15 45.09,48.69 R17.2 | C28.2 v47.15,47.15 | v47.15,47.15 | v53.02,47.15 C35.1 | R14.2 100.44,55.56 C13.2 v102.55,54.13 | v79.85,52.23 | v79.85,52.23 C8.2 | v81.12,50.01 C25.2 | v77.79,53.82 C7.2 | v82.55,56.52 C48.2 | C48.2 | R32.1 | R32.1 v88.42,61.28 | R2.1 74.03,63.98 v75.41,63.98 | C22.2 v62.07,69.37 | C34.2 71.28,51.44 v71.44,51.44 | v47.48,72.73 R43.1 | R26.2 48.66,71.14 v47.32,71.14 | v49.85,58.42 C17.2 51.12,58.26 C18.1 | v52.86,60.17 C43.2 | v43.18,58.58 | v43.18,58.58 C21.2 | v43.02,60.17 C42.2
  other vias: 105.41,54.29 106.84,54.29
  pour Bottom (isolate 0.305, no thermals): 41.76,109.4 140.4,109.4 140.4,41.46 107.31,41.46 107.31,37.73 41.76,37.73
  pour Top (isolate 0.305, no thermals): 105.09,51.91 105.09,54.61 107.16,54.61 107.16,51.91
BTN1
  Top 1.27: U$33.17/A3 70.34,43.65 BTN.2
BTN2
  Top 1.27: U$33.16/A2 72.87,39.56 BTN.1
BTN3
  Top 0.61: U$33.33/A14 106.56,38.89 ESP/BTNS.8
BTN4
  Top 0.61: U$33.34/A15 103.36,37.93 104.93,36.35 ESP/BTNS.7
BUZZER
  Top 0.813: U$33.2 55.1,21.64 SG1.+
CRNT_READ
  Top 0.61: 68.26,66.83 64.02,71.23 62.87,72.39 62.71,72.39 62.71,72.41 R7.1 | R9.2 71.48,66.99 IC14.13 68.42,66.99 68.26,66.83 | IC14.5 65.09,63.18 66.67,64.77 66.67,65.25 68.26,66.83
  pour Top (isolate 0.305, no thermals): 61.12,71.6 63.5,73.98 64.29,73.18 61.91,70.8
CRNT_READ_RAW
  Top 0.406: R10.1 49.41,75.83 IC8.4 48.25,77.87 R43.2
  Top 0.61: R10.1 49.73,74.25 50.16,73.82 61.12,73.82 61.12,73.58 C52.2
  pour Top (isolate 0.305, no thermals): 62.07,75.41 59.69,73.03 60.48,72.23 62.87,74.61
DSPLY_CS
  Top 0.61: 80.49,19.87 80.5,19.87 | 80.5,19.87 80.18,20.19 78.59,20.19 76.37,22.41 71.61,22.41 70.34,23.68 U$33.8 | 80.5,19.87 81.92,18.45 DSPLY.1
DSPLY_DC
  Top 0.203: U$33.26 90.33,23.98 90.33,20.16 92.08,18.41 DSPLY.5
DSPLY_LED_B
  Top 0.203: T14.1 69.7,28.2 67.8,26.3 U$33.7
DSPLY_LED_G
  Top 0.203: T13.1 65.89,30.11 65.89,25.58 65.26,24.95 U$33.6
DSPLY_LED_R
  Top 0.203: U$33.5 62.72,29.79 T12.1
DSPLY_RST
  Top 0.203: U$33.24 85.88,24.01 85.88,20.16 84.45,18.73 DSPLY.2
ENC_A
  Top 0.61: U$33.21/A7 60.18,40.47 ENC.1
ENC_B
  Top 0.61: U$33.22/A8 57.64,40.47 ENC.2
ENC_BTN
  Top 0.61: U$33.23/A9 55.1,40.47 ENC.3
ESP-IO
  Top 0.61: U$33.35/A16 100.82,35.71 105.25,31.27 ESP/BTNS.5
ESP-RST
  Top 0.61: U$33.28 97.62,26.19 ESP/BTNS.3
ESP-RX
  Top 0.61: U$33.32/A13 106.56,23.65 ESP/BTNS.2
ESP-TX
  Top 0.61: U$33.31/A12 103.36,23.64 105.89,21.11 ESP/BTNS.1
FAN-OUT
  Top 0.406: U$33.29 98.28,22.95 105.67,15.56 FAN.1
GND_OUT_CON
  pour Top (isolate 0.305, no thermals): 137,44.45 131.13,44.45 131.13,46.35 124.78,46.35 124.78,50.8 131.13,50.8 131.13,53.34 137,53.34
IDAC_CS
  Top 0.305: IC7.1 71.74,52.72 73.82,50.64 73.82,45.24 75.42,43.65 U$33.15/A1
ISET
  Top 0.305: IC14.12 68.74,65.72 67.79,64.77 67.79,58.9 69.22,57.47 71.6,57.47 71.74,57.32 IC7.6
LED1
  Top 0.203: U$33.3/CANTX 57.64,25.26 56.68,26.22 55.49,26.22 55.09,26.61 55.09,29.6 R28.1
LED2
  Top 0.203: R29.1 57.63,29.36 57.63,26.54 59.86,24.31 U$33.4/CANRX
MOSI  (via drill 0.35)
  Top 0.305: 86.84,22.96 86.84,24.76 81.76,29.84 81.76,41.27 76.2,46.83 76.2,53.42 v76.36,53.58 76.06,53.88 IC3.3 | IC7.3 73.07,54.61 v73.9,54.61
  Top 0.61: 86.84,22.96 86.84,21.47 R11.1 87,21.32 DSPLY.3
  Bottom 0.305: v73.9,54.61 75.64,54.61 76.36,53.9 v76.36,53.58
N$1
  Top 0.813: C20.2 51.04,12.17
  pour Top (isolate 0.305, no thermals): 49.53,13.12 49.53,11.69 52.07,11.69 53.98,9.79 56.67,9.79 57.31,10.42 57.31,11.22 55.09,13.44 52.55,13.44 52.23,13.12
N$2  (via drill 0.4)
  Top 0.813: IC10.1 18.1,43.64
  other vias: 17.5,40.34 20,40.34 22.5,40.34 24.21,40.34 24.21,42.84 22.5,42.84 20,42.84 17.5,42.84 17.5,45.34 20,45.34 22.5,45.34 24.21,45.34 24.21,47.84 22.5,47.84 20,47.84 17.5,47.84 17.5,50.34 17.02,52.84 17.5,55.66 22.5,55.66 25,55.66 27.5,55.66 27.5,52.84 25,50.34 27.5,50.34 22.5,50.34 20,50.34 20,55.62 22.02,52.84
  pour Top (isolate 0.305, no thermals): 28.43,45.08 24.8,45.08 24.8,48.89 15.75,48.89 15.75,38.6 26.86,38.6 26.86,39.36 28.43,39.36
  pour Top (isolate 0.305, no thermals): 15.72,38.6 15.72,57.41 27.55,57.41 28.43,56.54 28.43,38.6
  pour Bottom (isolate 0.305, no thermals): 15.72,38.6 15.72,57.41 27.55,57.41 28.43,56.54 28.43,38.6
N$3
  Top 1.27: 116.37,79.88 T6.C | T6.C 116.06,76.7 116.06,83.37 | 116.37,74.65 T6.C | T3.2 81.92,68.74 81.6,69.06 81.6,72.07 78.91,74.76 T5.C | T7.2 111.83,68.52 D14.C 112.43,68.61 116.37,72.56 T6.C | C11.1 68.27,86.83 68.1,87 56.44,87 R5.I1
  pour Top (isolate 0.305, no thermals): 57.71,97.34 57.71,87.89 55.56,87.89 55.56,85.91 65.89,85.91 65.89,80.19 76.69,80.19 76.69,73.21 81.13,73.21 81.13,80.19 114.15,80.19 114.15,73.21 118.59,73.21 118.59,89.72 74.78,89.72 74.78,97.34
N$4
  Top 0.61: D3.1 119.06,68.53 122,71.46 R20.1
  pour Top (isolate 0.305, no thermals): 120.33,69.95 120.33,78.76 126.05,78.76 126.05,69.95
N$5
  Top 1.27: T7.1 109.45,71.06 110.91,72.52 T6.B
N$6
  Top 0.406: T11.B 60.64,60.8 60.8,60.64 IC14.7
N$7
  Top 0.203: T12.3 63.67,29.55 65.25,27.96 65.25,26.85 63.98,25.58 63.98,22.96
  Top 0.406: 63.98,22.96 LED.3
N$8
  Top 0.406: 84.62,76.13 T5.E
  Top 0.813: D2.1 83.66,75.68 T5.E
  pour Top (isolate 0.305, no thermals): 83.03,78.92 93.83,78.92 93.83,73.21 83.03,73.21
N$9
  Top 0.61: U$33.27 93.2,23.3 R16.2
N$10
  Top 0.406: D1.3 83.19,63.82 77.15,63.82 76.2,64.77 I_PROT.1
N$11
  Top 0.406: IC2.3 88.74,54.93 88.58,54.77 88.58,51.91 89.06,51.44 96.57,51.44 R1.2
  Top 0.813: R1.2 98.74,50.85 R12.1
N$12
  Top 0.406: R15.2 82.6,53.5 84.14,53.5 IC2.7
N$13
  pour Top (isolate 0.305, no thermals): 120.09,15.56 123.83,15.56 124.46,16.19 126.05,16.19 127.08,15.16 127.08,13.26 126.44,12.62 124.06,12.62 122.63,14.05 120.09,14.05
N$14
  Top 0.406: IC12.5 62.67,52.67 C36.1
N$15
  Top 1.27: T3.1 79.38,68.74 76.68,71.44 76.04,71.44 73.45,74.03 T5.B
N$16
  Top 0.813: T4.2 96.47,53.29 R13.2 R14.1
N$17
  Top 0.61: U$33.11/MOSI 77.96,22.72 79.22,21.46 79.23,21.46 84.86,21.46 R11.2
N$18
  Top 0.406: IC2.2 90.81,53.66 91.76,54.61 C26.2 | 93.03,54.61 93.66,53.98 95.73,53.98 97.04,55.29 R13.1
  Top 0.61: C26.2 93.03,54.61
N$19
  Top 0.203: R15.1 82.66,55.56 86.04,55.56
  Top 0.406: 86.04,55.56 87.79,53.82 T2.B
N$20  (via drill 0.35)
  Top 0.203: v56.37,25.27 56.13,25.5 53.67,25.5 52.48,26.69 52.48,29.68 R28.2
  Bottom 0.152: v56.37,25.27 56.37,22.96
  Bottom 0.406: 56.37,22.96 56.37,22.69 LED.1
N$21
  Top 0.406: C6.2 71.6,60.33 71.6,59.37 71.91,59.05 79.69,59.05 80.01,59.37 R24.1
  Top 0.61: C6.2 71.28,60.64 IC14.8
N$22
  Top 0.203: R24.2 80.22,61.91
  Top 0.406: R24.2 79.96,62.39 82.55,62.39 | 82.55,62.39 84.45,62.39 84.61,62.55 84.61,66.36 T3.3 | D1.1 82.55,62.39
  Top 0.813: C4.2 79.8,62.23 R24.2 | T3.3 84.45,67.79 86.2,69.53 D2.3 98.74,70.96 103.73,65.98 T7.3 117.16,65.98 D3.3
N$23  (via drill 0.35)
  Top 0.203: R29.2 60.17,29.68 60.17,26.69 61.37,25.5 v61.45,25.5
  Bottom 0.152: v61.45,25.5 61.45,22.96
  Bottom 0.406: 61.45,22.96 LED.2
N$24
  Top 0.305: IC18.1 57.42,57.58 56.42,58.58 IC18.8 53.34,58.58 C17.1
  Top 0.406: L8.1 53.02,58.26 C17.1
N$25
  Top 0.406: C40.2 60.48,53.82 59.05,55.25 IC12.2
  Top 0.813: L5.1 C37.2 C40.2 | C40.2
N$26
  Top 0.813: R18.2 R25.1
N$27
  Top 0.813: R8.1 77.74,60.28 C4.1
N$28
  Top 0.813: R9.1 71.75,69.26 C5.1
N$29
  pour Bottom (isolate 0.305): 12.71,108.85 44.94,108.85 44.94,81.86 12.71,81.86
N$30
  Top 0.813: R25.2 R26.1
N$31
  Top 0.61: IC14.9 71.28,61.91 C6.1
  Top 0.813: R2.2 71.91,64.09 C6.1 73.61,62.23 R3.2 R8.2
N$32
  Top 0.813: R19.2 64.5,56.67 C45.1
N$33
  Top 0.406: IC2.1 91.76,52.39 C26.1
  Top 0.813: C26.1 T4.1
N$34
  Top 0.813: SINK.2 94.41,55.24 T4.3
N$35
  Top 0.813: IC15.2 73.22,9.3 L2.1
  Top 1.27: C39.2 66.36,9.3 IC15.2
N$36
  Top 0.813: V_SEL.3 L3.2
N$38
  Top 0.813: T1.3 124.02,24.37 D8.A 124.11,24.79
  Top 1.27: 124.11,24.79 REL1.+
N$41
  Top 0.406: 89.96,49.37 86.2,49.37 85.88,49.69 T2.E
  Top 0.61: T2.E 85.88,54.29 85.25,54.93 IC2.6
  Top 0.813: R35.1 89.96,49.37 R37.1
N$45
  Top 0.406: R40.1 59.53,61.71 59.53,62.87 59.85,63.18 61.75,63.18 62.71,62.23 T11.E
  Top 0.61: T11.E 64.19,61.91 IC14.6 65.56,61.91 65.88,61.59 65.88,59.01 R41.1
N$46
  Top 0.203: T13.3 67.16,25.66 66.53,25.03 66.53,22.96
  Top 0.406: 66.53,22.96 LED.4
N$47
  Top 0.406: IC8.8 54.11,82.26 R45.1
N$48
  Top 0.203: T14.3 70.65,26.69 69.06,25.11 69.06,22.96
  Top 0.406: 69.06,22.96 LED.5
N$49
  Top 0.203: IC8.2 48.73,79.17 48.26,79.64 48.26,81.7 48.9,82.34 50.36,82.34 R44.2
  Top 0.406: IC8.1 49.41,81.39 R44.2
N$50
  Top 0.406: IC8.6 54.94,78.52 55.25,78.21 55.25,77.57 55.89,76.94 C27.2
N$51
  Top 0.406: R44.1 R5.E2
N$52
  Top 0.406: R45.2 54.3,88.06 55.24,89 R5.E1
N$53  (via drill 0.35)
  Top 0.813: v29.53,45.51 28.68,46.35 T15.1
  Bottom 0.813: IC10.2 19.89,33.65 23.97,37.73 28.42,37.73 29.53,38.84 v29.53,45.51
N$54
  Top 0.813: IC10.3 16.49,31.11 14.46,29.08 14.46,24.4 13.86,23.81 T17.1
N$55  (via drill 0.35)
  Top 0.813: v29.38,26.22 29.38,24.78 28.4,23.81 T16.1
  Bottom 0.813: IC10.7 27.98,33.65 29.38,32.25 v29.38,26.22
N$56  (via drill 0.35)
  Top 0.813: v14.16,46.35 T18.1
  Bottom 0.813: IC10.4 17.02,28.57 14.8,30.79 14.8,45.71 v14.16,46.35
N$57  (via drill 0.4)
  Top 0.813: T17.3 20.45,20.95 | IC10.8 24.43,36.19 23.03,34.79 23.03,20.82 20.58,20.82
  other vias: 27.5,10.34 27.5,12.84 27.5,15.34 25,15.34 25,10.34 22.5,15.34 20,15.34 17.5,15.34 17.5,10.34 17.5,17.84 17.5,20.34 17.5,22.84 17.5,25.34 20,25.34 20,22.84 20,20.34 20,17.84 22.5,17.84 22.5,20.34 22.5,22.84 22.5,25.34 24.36,17.84 24.36,20.34 24.05,22.84 20,10.3 22.5,10.3
  pour Bottom (isolate 0.305, no thermals): 28.45,22.38 24.64,22.38 24.64,26.03 15.75,26.03 15.75,9.2 28.45,9.2
  pour Top (isolate 0.305, no thermals): 28.45,22.38 24.64,22.38 24.64,26.03 15.75,26.03 15.75,9.2 28.45,9.2
OVRCRNT_DET  (via drill 0.35)
  Top 0.203: IC14.14 73.34,68.26
  Top 0.61: C5.2 69.85,68.32 IC14.14 68.74,68.26 v68.26,68.74 | IC14.3 65.25,65.72 v66.52,66.99 | 73.34,68.26 I_PROT.2
  Bottom 0.61: v66.52,66.99 v68.26,68.74
OVRCRNT_DET_BUF
  Top 0.203: R23.2 64.19,66.99 IC14.2
  Top 0.406: IC14.1 IC14.2
P_VSS  (via drill 0.4)
  Top 0.813: IC10.5 28.89,28.57 C53.2
  Bottom 0.813: IC10.5 23.15,28.57 21.59,27.01 13.33,27.01 12.5,27.52
  other vias: 2.5,14.35 2.5,16.85 5,16.85 5,14.35 7.5,14.35 7.5,16.85 7.5,19.35 7.5,21.85 5,24.35 5,27.13 2.5,27.13 2.5,24.35 5,21.85 5,19.35 2.5,19.35 2.5,21.85 7.5,27.13 7.5,24.35 2.5,42.41 5,42.41 2.5,39.91 5,39.91 7.5,42.41 7.5,44.91 7.5,47.41 7.5,49.91 7.5,52.41 5,52.41 5,49.91 5,47.41 5,44.91 2.5,44.91 2.5,47.41 2.5,49.91 2.5,52.41 2.5,56.05 5,56.05 7.5,56.05 7.52,59.94 7.5,64.94 5,69.94 5,64.94 5.02,59.94 2.5,64.94 2.5,69.94 2.5,74.94 5,74.94 7.5,74.94 7.5,79.94 6.25,84.94 7.5,89.94 5,89.94 3.75,84.94 5,79.94 2.5,79.94 2.5,89.94 2.5,94.94 2.5,99.94 5,99.94 5,94.94 10,89.94 8.75,84.94 10,79.94 10,74.94 12.5,89.94 11.25,84.94 12.5,79.94 12.5,74.94 10,52.41 10,56.05 10.02,59.94 10,64.94 12.5,64.94 7.5,39.91 10,39.91 10,27.13 12.5,52.41 12.5,56.05 12.52,59.94 12.5,39.91 12.5,27.13 10,49.87 12.5,49.87 2.5,59.94 7.5,33.2 5,33.2 2.5,33.2 2.5,37.16 5,37.16 7.5,37.16 10,33.2 10,37.16 12.5,33.2 12.5,37.16 7.5,29.59 5,29.59 2.5,29.59 10,29.55 12.5,29.55 9.92,16.85 9.92,14.35 12.42,14.35 12.42,16.85
  pour Bottom (isolate 0.305): 0.2,109.96 13.2,109.96 13.2,63.92 0.2,63.92
  pour Top (isolate 0.305, no thermals): 13.34,13.3 1.12,13.3 1.12,102.1 13.5,102.1 13.5,47.97 9.69,47.97 9.69,44.79 13.34,44.79 13.34,25.27 9.53,25.27 9.53,22.41 13.34,22.41
  pour Bottom (isolate 0.305, no thermals): 13.34,13.3 1.12,13.3 1.12,64.6 13.5,64.6 13.5,47.97 9.69,47.97 9.69,44.79 13.34,44.79 13.34,25.27 9.53,25.27 9.53,22.41 13.34,22.41
REL-OUT
  Top 0.406: U$33.30 100.82,22.85 104.35,19.31 115.86,19.31 R48.2
  Top 0.813: T1.1 R48.2
SCK  (via drill 0.35)
  Top 0.305: v83.98,26.19 83.5,26.19 79.22,30.48 79.22,42.55 75.41,46.35 75.41,53.18 | v86.84,26.19 88.58,26.19 89.38,25.4 89.38,22.92 | 75.41,53.18 75.09,52.86 72.71,52.86 72.39,53.18 IC7.2 | 75.41,53.18 IC3.2
  Top 0.61: 89.38,22.92 89.38,21.48 R16.1 89.53,21.23 DSPLY.4
  Bottom 0.305: v83.98,26.19 v86.84,26.19
SCL  (via drill 0.35)
  Top 0.305: U$33.19/A5/SCL 65.25,39.56 65.25,43.34 64.61,43.97 61.52,43.97 R4.1 58.93,43.94 54.45,48.42 54.45,55.09 55.26,55.89 IC18.10 | v89.38,40.48 90.01,41.12 92.87,41.12 94.37,42.62 IC19.10
  Bottom 0.406: v89.38,40.48 89.38,38.42 87.63,36.67 68.42,36.67 65.73,39.36 65.45,39.36 U$33.19/A5/SCL
SDA  (via drill 0.35)
  Top 0.305: U$33.18/A4/SDA 67.8,40.71 66.44,42.07 66.44,43.34 64.8,44.97 R6.2 62.02,46.51 57.31,46.51 55.09,48.74 55.09,54.93 55.88,55.72 55.88,56.83 56.2,57.15 56.2,57.78 55.9,58.08 IC18.9 | v86.84,40.48 88.27,41.91 91.76,41.91 93.19,43.34 93.19,44.29 93.48,44.59 IC19.9
  Bottom 0.406: U$33.18/A4/SDA 67.8,38.88 68.9,37.78 85.88,37.78 86.84,38.73 v86.84,40.48
TH0
  Top 0.813: C49.2 103.04,74.48 R36.2 98.93,77.02 NTC.1
  Top 1.27: R42.2 102.79,74.08 C49.2
TH0_ADC
  Top 0.305: IC19.4 100.67,45.59 101.33,44.93 NTC_ADC.1
V_OUT_CON
  pour Top (isolate 0.305, no thermals): 111.28,53.34 114.78,53.34 117.32,50.8 123.51,50.8 123.51,46.35 117.16,46.35 117.16,44.45 111.28,44.45
VDAC_CS  (via drill 0.35)
  Top 0.305: IC3.1 74.76,53.8 v74.61,53.66 | v74.61,52.07 74.61,45.72 77.96,42.38 U$33.14/A0
  Bottom 0.305: v74.61,53.66 v74.61,52.07
VREF4096
  Top 0.305: 79.69,56.99 C8.1 | C9.1 70.96,55.56 73.03,55.56 | 73.03,55.56 75.88,55.56 76.06,55.74 IC3.4 77.28,56.49 C7.1 | IC7.4 73.04,55.58 73.03,55.56
  Top 0.406: IC12.6 64.33,54.6 R19.1
  Top 0.813: R19.1 C41.1 69.85,53.18 C34.1 70.01,55.88 C9.1
  Top 1.27: C7.1 79.69,56.99
VSET
  Top 0.305: IC14.10 68.9,63.18 68.58,62.87 68.58,59.21 69.53,58.26 74.45,58.26 74.76,57.96 IC3.6
VSS  (via drill 0.35)
  Top 0.406: 49.7,30.9 v51.13,30.9 51.13,32.97 50.65,33.44 C31.2
  Top 0.61: C30.2 49.7,30.9 | T12.2 64.7,30.5 v64.7,31.69 | T13.2 68.19,30.5 v68.19,31.69 | T14.2 71.68,30.5 v71.68,31.69
  Top 0.813: 69.85,6.76 IC15.1 | C38.2 v73.66,15.34 | v118.43,25.4 118.43,23.89 R48.1 | v122.24,20.32 122.24,21.75 T1.2
  Top 1.27: C39.1 69.37,6.29 69.85,6.76
  pour Bottom (isolate 0.305, no thermals): 140.4,0.1 6.99,0.1 6.99,15.53 11.91,15.53 11.91,7.41 30.65,7.41 30.65,15.49 41.92,15.49 41.92,36.3 108.59,36.3 108.59,40.35 140.4,40.35
  pour Top (isolate 0.305, no thermals): 72.71,8.2 73.98,8.2 73.98,6.77 72.87,5.66 72.87,3.6 71.28,3.6 71.28,5.34 70.64,5.98 69.06,5.98 69.06,7.41 69.22,7.57 72.07,7.57
  pour Top (isolate 0.305, no thermals): 49.53,10.26 49.53,7.25 52.23,7.25 52.39,7.41 56.52,7.41 56.52,8.99 53.5,8.99 52.23,10.26
  pour Top (isolate 0.305, no thermals): 120.09,12.3 123.11,12.3 123.67,11.75 126.52,11.75 127,11.27 127,10.56 126.52,10.08 122.87,10.08 121.92,9.13 119.3,9.13 119.3,11.51

## Text on the board
tNames: + | R5 | B1 | B2 | B | BTN | A | B3 | B4 | VSS | IO | 3.3V | RST | RX | TX | LED 1 | LED 2 | R G B | CS RST MOSI SCK DC 3.3 VSS | PWM | + | - | Netzteil_Darlington_v2 / Rev 1.9 | Input Voltage AC / 18V - 24V | azzurro@ne-mail.net | V_SEL: / 1-2: Flash mode / 2-3: Normal operation